# Altium PCB BD658T_AMP_ES4_220615_F.PcbDoc (part 2 of 4)
Units mm, origin at the board's own origin, x right, y up, seen from the top; angles counter-clockwise.
Board outline 153 x 112 mm, 4 copper layers (TOP, LAYER2, LAYER3, BOTTOM), stack 1.59 mm thick; 286 components, 184 nets, 896 pads, 614 vias.
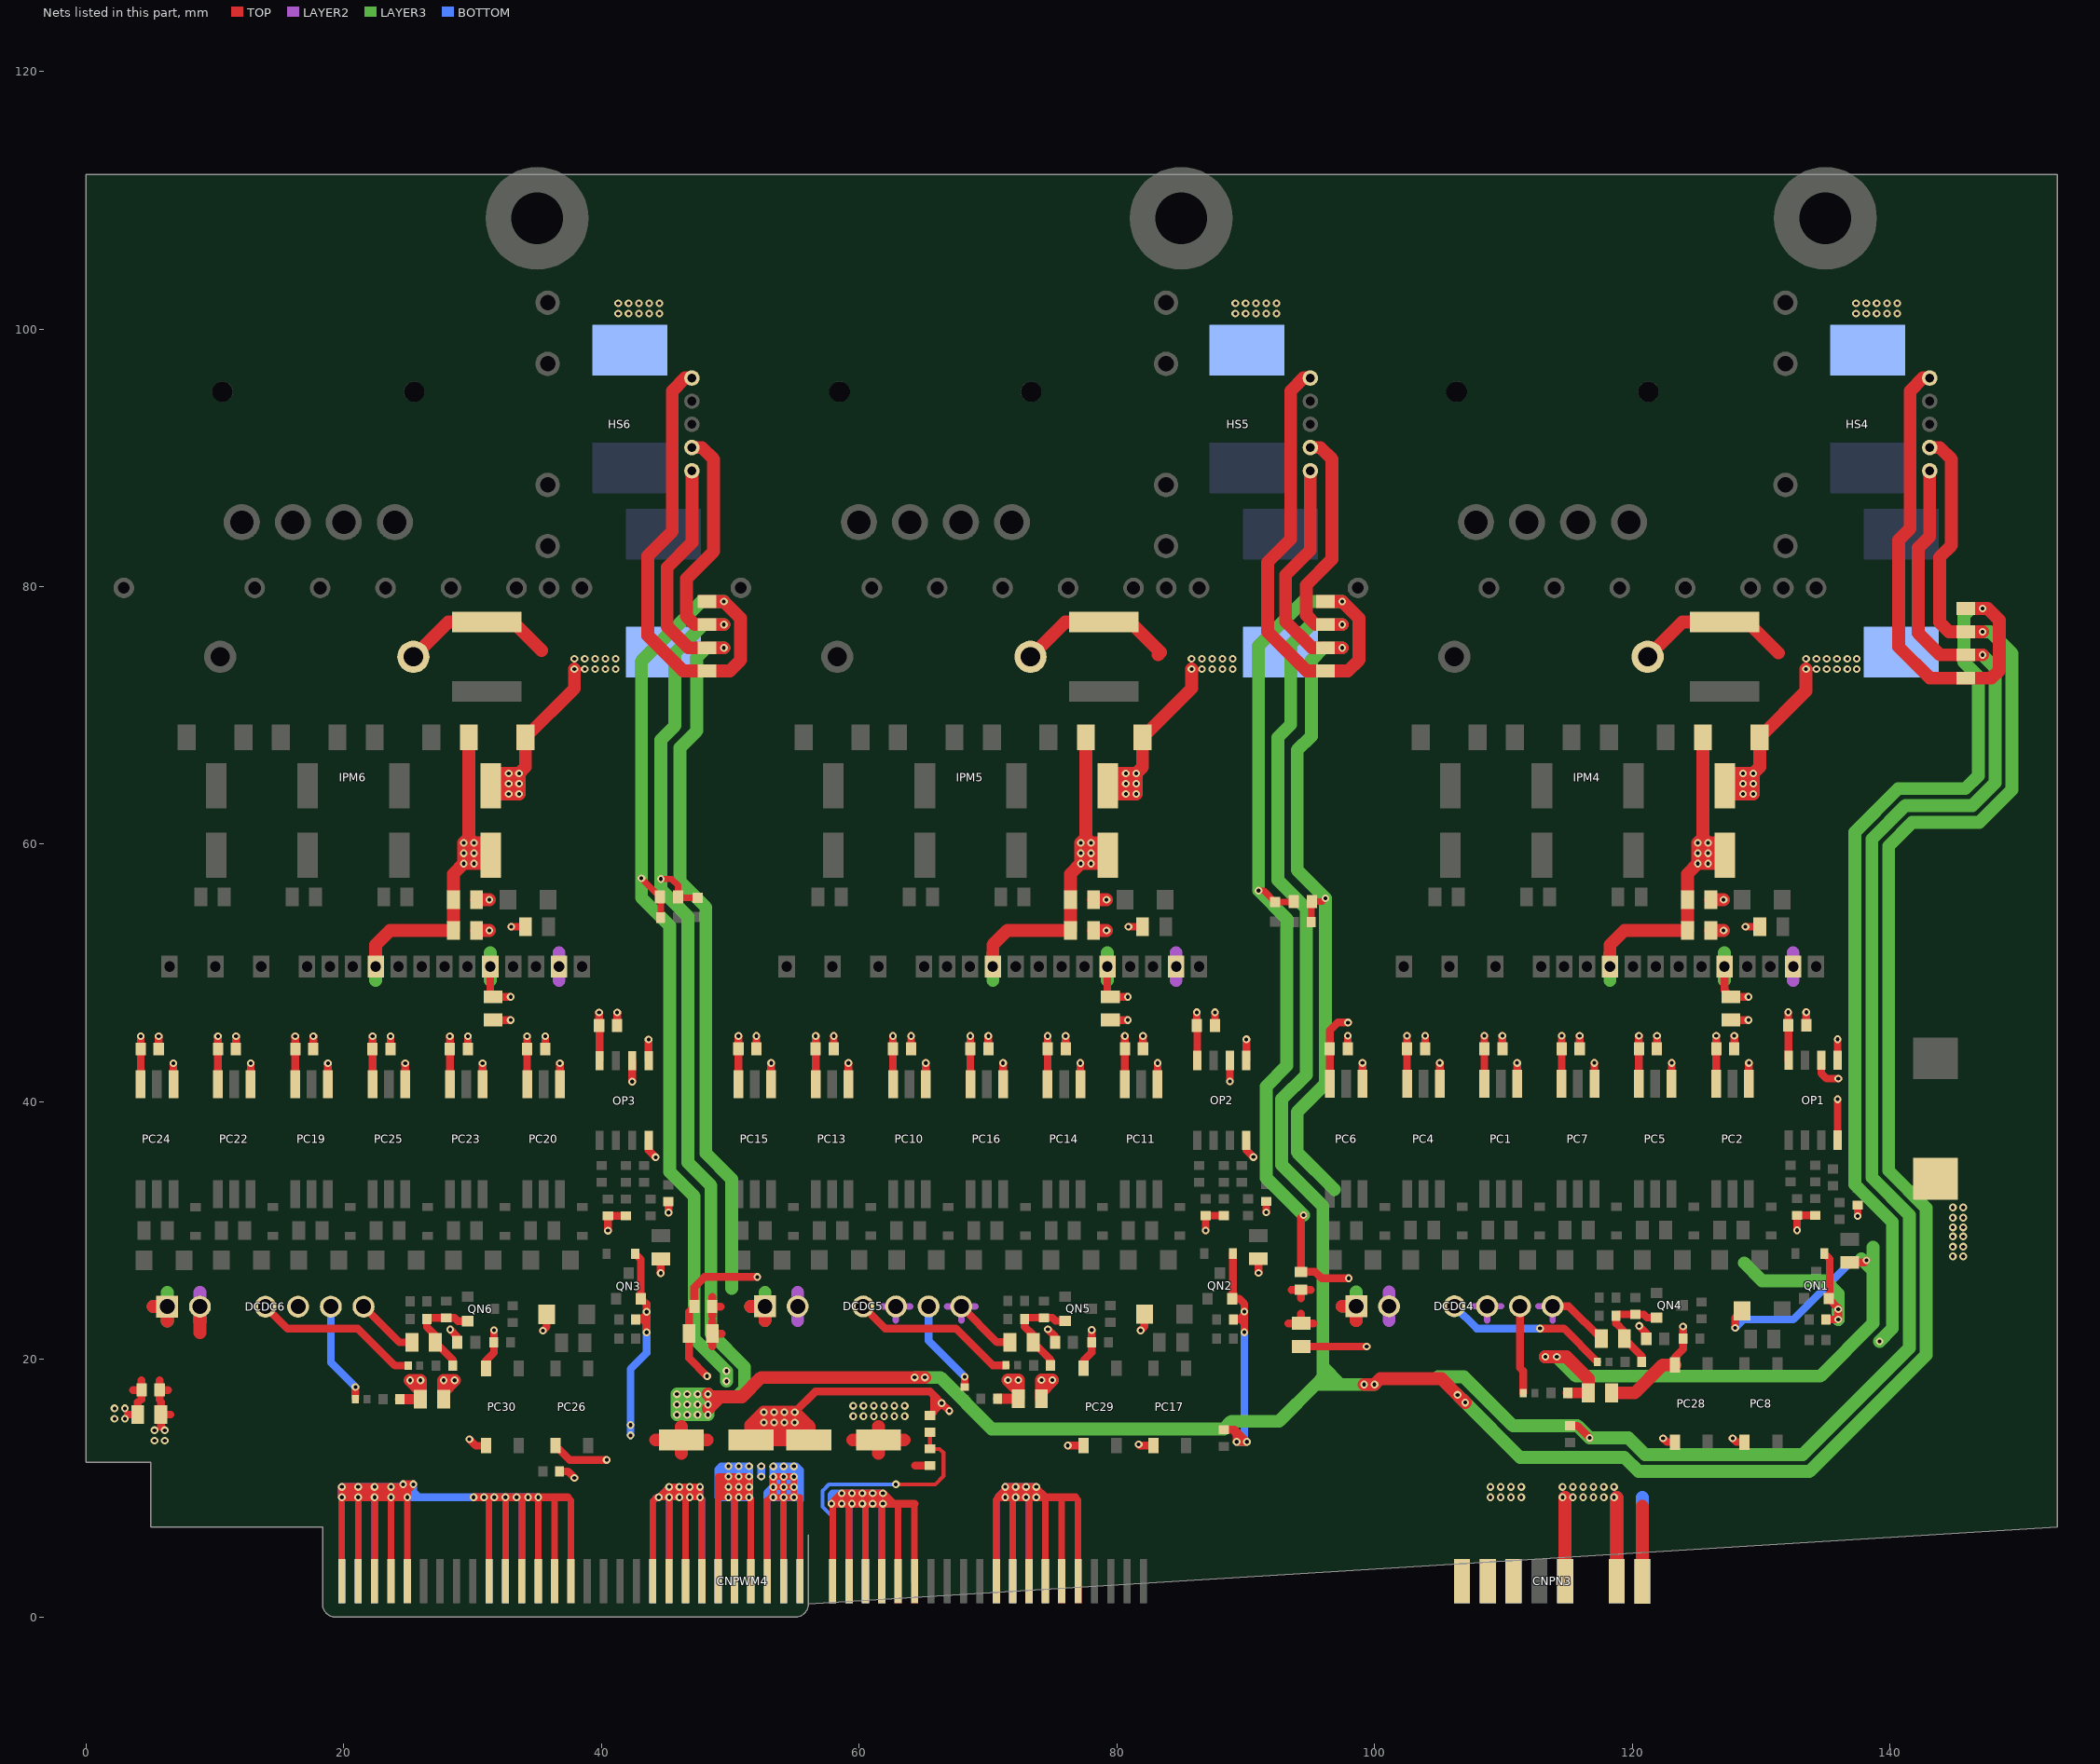
[diagram p4: the nets of this part, all layers, seen from the top]

## Via types
v1: diameter 0.6, hole 0.3, TOP to BOTTOM, 546 vias
v2: diameter 0.4, hole 0.4, TOP to BOTTOM, 56 vias
v3: diameter 6.5, hole 6.5, TOP to BOTTOM, 6 vias
v4: diameter 0.1/0.1/0.1/0.1 (per signal layer), hole 4, TOP to BOTTOM, 4 vias
v5: diameter 4, hole 4, TOP to BOTTOM, 2 vias

## Nets (pads, with @x,y where several pads share a name; then routed paths per layer and width w, separated by ;. In a path a pad name is that pad's centre, name@x,y a point inside that pad or via, vN(x,y) a via of type N, cw(c..) or ccw(c..) an arc to the next point about the centre after c; other vN are vias at no path point)
AMP_G_A4: BC1.2 BC2.1 BC4.2 BC11.2 BC19.2 C1.2 C11.2 C12.1 C13.2 C23.2 C24.1 C25.2 C35.2 C36.1 CNPWM4.10 CNPWM4.12 CNPWM4.13 CNPWM4.14 CNPWM4.15 CNPWM4.16 CNPWM4.17 CNPWM4.18 CNPWM4.19 CNPWM4.20 CNPWM4.30 CNPWM4.32 CNPWM4.33 CNPWM4.34 CNPWM4.35 CNPWM4.36 CNPWM4.37 CNPWM4.38 CNPWM4.40 CNPWM4.53 CNPWM4.54 CNPWM4.55 CNPWM4.56 CNPWM4.57 CNPWM4.58 CNPWM4.59 CNPWM4.60 CNPWM4.70 CNPWM4.72 CNPWM4.73 CNPWM4.74 CNPWM4.75 CNPWM4.76 CNPWM4.77 CNPWM4.78 CNPWM4.79 CNPWM4.80 CNPWM4.90 CNPWM4.92 CNPWM4.93 CNPWM4.94 CNPWM4.95 CNPWM4.96 CNPWM4.97 CNPWM4.98 DCDC4.2 DCDC5.2 DCDC6.2 EC1.2 EC2.1 HS4.5 HS5.5 HS6.5 LED1.2 PC8.3 PC17.3 PC26.3 PC28.3 PC29.3 PC30.3 R2.2 R112.1 | length 883.2
  TOP w0.5: CNPWM4.98@19.846,2.775 v1(19.846,9.3) ; CNPWM4.96@21.116,2.775 v1(21.116,9.3) ; CNPWM4.94@22.386,2.775 v1(22.386,9.3) ; CNPWM4.92@23.656,2.775 v1(23.656,9.3) ; CNPWM4.90@24.926,2.775 v1(24.926,9.3) ; CNPWM4.80@31.276,2.775 31.276,9.3 ; CNPWM4.78@32.546,2.775 v1(32.546,9.3) ; CNPWM4.76@33.816,2.775 33.816,9.3 ; CNPWM4.74@35.086,2.775 v1@35.086,9.3 ; CNPWM4.72@36.356,2.775 36.356,9.3 ; 37.4,9.3 37.626,9.074 CNPWM4.70@37.626,2.775 ; v1(43.1,57.35) BC2.1@44.55,55.9 44.6,55.85 R2.2@44.6,54.3 ; CNPWM4.60@43.976,2.775 43.976,8.976 44.3,9.3 v1(44.446,9.3) ; CNPWM4.58@45.246,2.775 v1(45.246,9.3) ; CNPWM4.56@46.516,2.775 46.516,9.3 ; CNPWM4.54@47.786,2.775 47.786,9.16 v1(47.646,9.3) ; v1(57.846,8.8) 57.946,8.7 v1@57.946,8.646 ; CNPWM4.40@57.946,2.775 v1@57.946,8.646 ; v1@58.1,8.8 v1@57.946,8.646 ; CNPWM4.38@59.216,2.775 v1@59.216,8.8 ; CNPWM4.36@60.486,2.775 v1@60.486,8.8 ; 61.046,9.254 61.5,8.8 61.756,8.544 CNPWM4.34@61.756,2.775 ; CNPWM4.32@63.026,2.775 63.026,8.8 ; CNPWM4.30@64.296,2.775 64.296,8.8 ; CNPWM4.20@70.646,2.775 70.646,9.146 70.8,9.3 ; CNPWM4.18@71.916,2.775 v1@71.916,9.3 ; CNPWM4.16@73.186,2.775 v1@73.186,9.3 ; CNPWM4.14@74.456,2.775 74.456,9.3 ; CNPWM4.12@75.726,2.775 75.726,9.3 ; 76.8,9.3 76.996,9.104 CNPWM4.10@76.996,2.775 ; v1(91,56.4) 91.4,56.4 LED1.2@92.3,55.5 93.7,55.5 BC1.2@93.75,55.55 ; v1(44.446,9.3) v1(45.246,9.3) ; v1(44.446,9.3) v1(45.246,10.1) ; v1(45.246,9.3) v1(46.046,10.1) ; v1(45.246,9.3) v1(46.046,9.3) ; v1(45.246,9.3) v1(45.246,10.1) ; v1(45.246,10.1) v1(46.046,9.3) ; v1(45.246,10.1) v1(46.046,10.1) ; v1(46.046,9.3) 46.516,9.3 ; v1(46.046,9.3) v1(46.846,10.1) ; v1(46.046,9.3) v1(46.046,10.1) ; v1(46.046,10.1) v1(46.846,10.1) ; v1(46.046,10.1) v1(46.846,9.3) ; 46.516,9.3 v1(46.846,9.3) ; v1(46.846,9.3) v1(46.846,10.1) ; v1(46.846,9.3) v1(47.646,9.3) ; v1(46.846,9.3) v1(47.646,10.1) ; v1(46.846,10.1) v1(47.646,10.1) ; v1(46.846,10.1) v1(47.646,9.3) ; v1(47.646,9.3) v1(47.646,10.1)
  TOP w0.6: 5.7,16.874 BC19.2@5.7,17.625 ; 5.7,18.376 BC19.2@5.7,17.625 ; 5.8,14.749 C25.2@5.8,15.725 ; 5.8,16.701 C25.2@5.8,15.725 ; 6.351,17.625 BC19.2@5.7,17.625 ; 6.551,15.725 C25.2@5.8,15.725 ; v1(29.75,13.8) 30.25,13.3 PC30.3@31.03,13.3 ; v1(30.076,9.3) v1(30.876,9.3) 31.276,9.3 v1(31.676,9.3) v1(32.546,9.3) v1(33.416,9.3) 33.816,9.3 v1(34.3,9.3) 35.086,9.3 v1(35.1,9.3) 36.356,9.3 37.4,9.3 ; PC26.3@36.43,13.3 37.53,12.2 v1(40.4,12.2) ; v1(48.2,18.7) 46.8,20.1 C13.2@46.8,22 46.8,23.7 BC11.2@47.2,24.1 47.2,25.6 48,26.4 v1(52.1,26.4) ; v1(55,15.9) 56.6,17.5 65.5,17.5 65.8,17.2 ; v1(57.846,8.8) v1(58.646,9.6) v1@58.9,9.6 ; 64.296,8.8 63.026,8.8 62.646,8.8 ; R112.1@65.5,15.65 65.8,15.95 65.8,16 ; v1(67,16) v1(66.4,16.6) ; v1(76.2,13.314) PC29.3@77.43,13.314 ; 76.8,9.3 75.726,9.3 74.456,9.3 ; v1(81.7,13.4) 81.786,13.314 PC17.3@82.83,13.314 ; C1.2@94.3,21 v1(99.4,21) ; v1(94.5,31.2) 94.3,31 BC4.2@94.3,26.8 95.4,26.8 95.9,26.3 v1(98,26.3) ; v1(122.4,13.877) 122.7,13.577 PC28.3@123.33,13.577 ; v1(127.8,13.877) 128.1,13.577 PC8.3@128.73,13.577 ; 19.846,9.77 20.316,9.3 ; 19.846,9.77 v1(19.846,9.3) 20.316,9.3 ; 19.846,9.77 v1(19.846,10.1) 20.4,10.1 ; 20.316,9.3 v1(21.116,10.1) ; 20.316,9.3 v1(21.116,9.3) ; 20.316,9.3 20.316,10.016 20.4,10.1 ; 20.4,10.1 v1(21.116,10.1) ; v1(21.116,9.3) v1(22.386,9.3) ; v1(21.116,9.3) v1(21.116,10.1) ; v1(21.116,9.3) 21.916,10.1 ; v1(21.116,10.1) 21.586,10.1 ; 21.586,10.1 21.916,10.1 ; 21.586,10.1 v1(22.386,9.3) ; 21.916,10.1 v1(22.386,10.1) ; v1(22.386,9.3) 22.856,9.3 ; v1(22.386,9.3) 22.386,9.77 ; 22.386,9.77 v1(22.386,10.1) ; 22.386,9.77 22.856,9.3 ; v1(22.386,10.1) 22.9,10.1 ; 22.856,9.3 22.856,10.056 22.9,10.1 ; 22.856,9.3 v1(23.656,9.3) ; 22.9,10.1 v1(23.656,10.1) ; 22.9,10.1 v1@23.656,9.344 ; v1(23.656,9.3) 24.1,9.3 ; v1(23.656,9.3) v1@23.656,9.344 ; v1@23.656,9.344 23.656,9.63 ; 23.656,9.63 24.126,10.1 ; 23.656,9.63 v1(23.656,10.1) ; v1(23.656,10.1) 24.126,10.1 ; 24.1,9.3 24.126,9.326 24.126,10.1 ; 24.1,9.3 v1(24.926,9.3) ; 24.126,10.1 v1@24.6,10.1 ; 24.126,10.1 v1(24.926,9.3) ; v1@24.6,10.1 24.926,10.1 24.926,9.826 ; v1@24.6,10.1 v1(24.6,10.3) v1(25.4,10.3) 24.926,9.826 ; v1(24.926,9.3) 24.926,9.826 ; v1(58.646,8.8) 58.1,8.8 v1@58.646,9.346 ; v1(58.646,8.8) 59.216,8.8 v1(59.446,8.8) ; v1(58.646,8.8) v1@58.646,9.346 ; v1(58.646,8.8) v1(59.446,9.6) ; v1@58.646,9.346 v1@58.9,9.6 ; v1@58.9,9.6 v1(59.446,9.6) ; v1(59.446,8.8) v1(60.246,9.6) ; v1(59.446,8.8) v1(60.246,8.8) ; v1(59.446,8.8) v1(59.446,9.6) ; v1(59.446,9.6) v1(60.246,9.6) ; v1(59.446,9.6) v1(60.246,8.8) ; v1(60.246,8.8) v1(61.046,9.6) ; v1(60.246,8.8) v1(60.246,9.6) ; v1(60.246,8.8) 60.486,8.8 v1(61.046,8.8) ; v1(60.246,9.6) v1(61.046,9.6) ; v1(60.246,9.6) v1(61.046,8.8) ; v1(61.046,8.8) 61.5,8.8 v1(61.846,8.8) ; v1(61.046,8.8) 61.046,9.254 v1(61.046,9.6) ; v1(61.046,8.8) v1(61.846,9.6) ; v1(61.046,9.6) v1(61.846,9.6) ; v1(61.046,9.6) v1(61.846,8.8) ; v1(61.846,8.8) 62.646,8.8 ; v1(61.846,8.8) v1(61.846,9.6) ; v1(61.846,9.6) 62.646,8.8 ; 65.8,16 v1(66.4,16.6) ; 65.8,16 65.8,17.2 ; 65.8,17.2 v1(66.4,16.6) ; v1(71.346,9.3) 70.8,9.3 v1@71.346,9.846 ; v1(71.346,9.3) 71.916,9.3 v1(72.146,9.3) ; v1(71.346,9.3) v1@71.346,9.846 ; v1(71.346,9.3) v1(72.146,10.1) ; v1@71.346,9.846 v1(71.346,10.1) ; v1(71.346,10.1) v1(72.146,10.1) ; v1(71.346,10.1) v1(72.146,9.3) ; v1(72.146,9.3) v1(72.946,10.1) ; v1(72.146,9.3) v1(72.946,9.3) ; v1(72.146,9.3) v1(72.146,10.1) ; v1(72.146,10.1) v1(72.946,10.1) ; v1(72.146,10.1) v1(72.946,9.3) ; v1(72.946,9.3) v1(72.946,10.1) ; v1(72.946,9.3) v1(73.746,10.1) ; v1(72.946,9.3) 73.186,9.3 v1(73.746,9.3) ; v1(72.946,10.1) v1(73.746,9.3) ; v1(72.946,10.1) v1(73.746,10.1) ; v1(73.746,9.3) 74.456,9.3 ; v1(73.746,9.3) v1@73.746,10.01 ; v1@73.746,10.01 74.456,9.3 ; v1@73.746,10.01 v1(73.746,10.1)
  TOP w1: 8.83,22.07 DCDC6.2@8.83,24.1 ; HS6.5@47.02,96.2 46.5,96.2 45.5,95.2 45.5,84.3 43.6,82.4 43.6,76.2 46.35,73.45 C35.2@48.2,73.45 49.95,73.45 50.8,74.3 50.8,77.55 v1(49.5,78.85) C36.1@48.2,78.85 ; HS5.5@95.02,96.2 94.5,96.2 93.5,95.2 93.5,83.7 91.7,81.9 91.7,76.5 94.75,73.45 C23.2@96.2,73.45 97.95,73.45 98.8,74.3 98.8,77.55 v1(97.5,78.85) C24.1@96.2,78.85 ; HS4.5@143.1,96.2 142.58,96.2 141.58,95.2 141.58,84.526 140.68,83.625 140.68,75.32 143.1,72.9 C11.2@145.9,72.9 147.9,72.9 148.5,73.5 148.5,77.4 147.6,78.3 v1(147.2,78.3) C12.1@145.9,78.3 ; EC2.1@51.6,13.75 EC2.1@52.85,13.75 ; EC2.1@51.6,13.75 EC2.1@51.6,14.1 ; EC2.1@51.6,13.75 52.95,15.1 ; EC2.1@51.6,14.1 v1(52.6,15.1) ; EC2.1@51.6,14.1 51.6,14.8 ; 51.6,14.8 51.6,14.9 v1(52.6,15.9) ; 51.6,14.8 51.9,15.1 ; 51.9,15.1 v1@52.6,15.8 ; 51.9,15.1 v1(52.6,15.1) ; v1(52.6,15.1) v1@52.6,15.8 ; v1(52.6,15.1) 52.95,15.1 ; v1@52.6,15.8 v1(52.6,15.9) ; v1(52.6,15.9) v1(53.4,15.9) ; EC2.1@52.85,13.75 54.1,13.75 ; EC2.1@52.85,13.75 v1@54.1,15 ; 52.95,15.1 v1(53.4,15.1) ; v1(53.4,15.1) v1(53.4,15.9) ; v1(53.4,15.1) v1(54.2,15.1) ; v1(53.4,15.9) v1(54.2,15.9) ; 54.1,13.75 v1@54.1,15 ; 54.1,13.75 EC1.2@55.55,13.75 ; v1@54.1,15 v1(54.2,15.1) ; v1(54.2,15.1) v1(54.2,15.9) ; v1(54.2,15.1) EC1.2@55.55,13.75 ; v1(54.2,15.1) v1(55,15.1) ; v1(54.2,15.9) v1(55,15.9) ; v1(55,15.1) 55,14.85 EC1.2@56.1,13.75 ; v1(55,15.1) 55.8,15.1 ; v1(55,15.1) v1(55,15.9) ; v1(55,15.9) 55.8,15.1 ; EC1.2@55.55,13.75 EC1.2@56.1,13.75 ; 55.8,15.1 56.1,14.8 EC1.2@56.1,13.75
  LAYER2 w1: 8.83,22.999 DCDC6.2@8.83,24.1 8.83,25.201 ; 55.23,23.013 DCDC5.2@55.23,24.114 55.23,25.215 ; 101.13,23.026 DCDC4.2@101.13,24.127 101.13,25.228
  LAYER3 w1: v1(49.5,78.85) 47.75,78.85 43.1,74.2 v1(43.1,57.35) 43.1,55.857 45.3,53.657 45.3,34.557 47.2,32.657 47.2,21.6 v1(49.7,19.1) v1(49.7,18.3) ; v1(94.5,31.2) 91.6,34.1 91.6,41.2 93.2,42.8 93.2,54.2 v1(91,56.4) 91,75.4 94.45,78.85 v1(97.5,78.85) ; v1(139.2,21.4) 140.2,22.4 140.2,30.66 137.29,33.57 137.29,60.945 140.665,64.32 145.865,64.32 146.865,65.32 146.865,73.035 145.75,74.15 145.75,77.75 146.3,78.3 v1(147.2,78.3)
  BOTTOM w0.5: CNPWM4.97@19.846,2.775 v1(19.846,9.3) ; CNPWM4.95@21.116,2.775 v1(21.116,9.3) ; CNPWM4.93@22.386,2.775 v1(22.386,9.3) ; CNPWM4.79@31.276,2.775 31.276,9.3 ; CNPWM4.77@32.546,2.775 v1(32.546,9.3) ; CNPWM4.75@33.816,2.775 33.816,9.3 ; 34.8,9.3 35.086,9.014 CNPWM4.73@35.086,2.775 ; CNPWM4.59@43.976,2.775 43.976,8.976 44.3,9.3 v1(44.446,9.3) ; CNPWM4.57@45.246,2.775 v1(45.246,9.3) ; CNPWM4.55@46.516,2.775 46.516,9.3 ; CNPWM4.53@47.786,2.775 47.786,9.16 v1(47.646,9.3) ; v1@57.946,8.8 v1(58.646,8.8) ; CNPWM4.37@59.216,2.775 v1@59.216,8.8 ; CNPWM4.35@60.486,2.775 v1@60.486,8.8 ; v1(61.046,8.8) 61.6,8.8 61.756,8.644 CNPWM4.33@61.756,2.775 ; CNPWM4.19@70.646,2.775 70.646,9.146 70.8,9.3 v1(71.346,9.3) ; CNPWM4.17@71.916,2.775 v1@71.916,9.3 ; CNPWM4.15@73.186,2.775 v1@73.186,9.3 ; v1(73.746,9.3) 74.3,9.3 74.456,9.144 CNPWM4.13@74.456,2.775 ; v1(44.446,9.3) v1(45.246,10.1) ; v1(44.446,9.3) v1(45.246,9.3) ; v1(45.246,9.3) v1(46.046,9.3) ; v1(45.246,9.3) v1(45.246,10.1) ; v1(45.246,9.3) v1(46.046,10.1) ; v1(45.246,10.1) v1(46.046,10.1) ; v1(45.246,10.1) v1(46.046,9.3) ; v1(46.046,9.3) v1(46.046,10.1) ; v1(46.046,9.3) v1(46.846,10.1) ; v1(46.046,9.3) 46.516,9.3 ; v1(46.046,10.1) v1(46.846,10.1) ; v1(46.046,10.1) v1(46.846,9.3) ; 46.516,9.3 v1(46.846,9.3) ; v1(46.846,9.3) v1(47.646,9.3) ; v1(46.846,9.3) v1(46.846,10.1) ; v1(46.846,9.3) v1(47.646,10.1) ; v1(46.846,10.1) v1(47.646,10.1) ; v1(46.846,10.1) v1(47.646,9.3) ; v1(47.646,9.3) v1(47.646,10.1)
  BOTTOM w0.6: v1(35.1,9.3) 34.8,9.3 v1(34.3,9.3) 33.816,9.3 v1(33.416,9.3) v1(32.546,9.3) v1(31.676,9.3) 31.276,9.3 v1(30.876,9.3) v1(30.076,9.3) 25.8,9.3 ; v1(52.4,10.9) v1(52.4,11.7) ; v1(57.846,8.8) 57.846,9.5 57.946,9.6 ; 70.8,9.3 v1@71.346,9.846 ; 74.3,9.3 v1@73.746,9.854 ; v1(19.846,10.1) 20.646,9.3 ; v1(19.846,10.1) v1(21.116,10.1) ; v1(19.846,10.1) v1(19.846,9.3) 20.316,9.3 ; 20.316,9.3 20.646,9.3 ; 20.316,9.3 v1(21.116,10.1) ; 20.646,9.3 v1(21.116,9.3) ; v1(21.116,9.3) v1(21.116,10.1) ; v1(21.116,9.3) v1@21.4,9.3 ; v1(21.116,10.1) 21.916,9.3 ; v1(21.116,10.1) v1@22.2,10.1 ; v1@21.4,9.3 21.916,9.3 ; v1@21.4,9.3 v1@22.2,10.1 ; 21.916,9.3 v1(22.386,9.3) ; v1@22.2,10.1 v1(22.386,10.1) ; v1(22.386,9.3) 22.9,9.3 ; v1(22.386,9.3) 22.386,9.63 ; 22.386,9.63 22.856,10.1 ; 22.386,9.63 v1(22.386,10.1) ; v1(22.386,10.1) 22.856,10.1 ; 22.856,10.1 22.856,9.344 22.9,9.3 ; 22.856,10.1 v1(23.656,10.1) ; 22.856,10.1 v1(23.656,9.3) ; 22.9,9.3 v1(23.656,9.3) ; v1(23.656,9.3) 24.456,9.3 ; v1(23.656,9.3) v1(23.656,10.1) ; v1(23.656,10.1) 24.456,9.3 ; v1(23.656,10.1) 24.4,10.1 v1(24.6,10.3) ; 24.456,9.3 24.6,9.444 v1(24.6,10.3) ; 24.456,9.3 v1(24.926,9.3) ; v1(24.6,10.3) 24.926,9.974 24.926,9.826 ; v1(24.926,9.3) 25.4,9.3 ; v1(24.926,9.3) 24.926,9.826 ; 24.926,9.826 v1(25.4,10.3) 25.4,9.7 ; 25.4,9.3 25.8,9.3 ; 25.4,9.3 25.4,9.7 ; 25.4,9.7 25.8,9.3 ; 57.946,9.5 v1(58.646,8.8) ; 57.946,9.5 57.946,8.8 v1@58.646,9.5 ; 57.946,9.5 57.946,9.6 ; 57.946,9.6 v1(58.646,9.6) ; v1(58.646,8.8) 59.216,8.8 v1(59.446,8.8) ; v1(58.646,8.8) v1@58.646,9.5 ; v1(58.646,8.8) v1(59.446,9.6) ; v1@58.646,9.5 v1(58.646,9.6) ; v1(58.646,9.6) v1(59.446,9.6) ; v1(58.646,9.6) v1(59.446,8.8) ; v1(59.446,8.8) v1(59.446,9.6) ; v1(59.446,8.8) v1(60.246,9.6) ; v1(59.446,8.8) v1(60.246,8.8) ; v1(59.446,9.6) v1(60.246,8.8) ; v1(59.446,9.6) v1(60.246,9.6) ; v1(60.246,8.8) 60.486,8.8 v1(61.046,8.8) ; v1(60.246,8.8) v1(61.046,9.6) ; v1(60.246,9.6) v1(61.046,8.8) ; v1(60.246,9.6) v1(61.046,9.6) ; v1(61.046,8.8) v1(61.046,9.6) ; v1(61.046,8.8) v1(61.846,9.6) ; v1(61.046,9.6) v1(61.846,9.6) ; v1(61.046,9.6) v1(61.846,8.8) v1(61.846,9.6) ; v1@71.346,9.846 v1(71.346,9.3) 71.916,9.3 v1(72.146,9.3) ; v1@71.346,9.846 v1(71.346,10.1) ; v1(71.346,10.1) v1(72.146,9.3) ; v1(71.346,10.1) v1(72.146,10.1) ; v1(72.146,9.3) v1(72.146,10.1) ; v1(72.146,9.3) v1(72.946,9.3) ; v1(72.146,9.3) v1(72.946,10.1) ; v1(72.146,10.1) v1(72.946,10.1) ; v1(72.146,10.1) v1(72.946,9.3) ; v1(72.946,9.3) v1(72.946,10.1) ; v1(72.946,9.3) v1(73.746,10.1) ; v1(72.946,9.3) 73.186,9.3 v1(73.746,9.3) ; v1(72.946,10.1) v1(73.746,9.3) ; v1(72.946,10.1) v1(73.746,10.1) ; v1(73.746,9.3) v1@73.746,9.854 ; v1@73.746,9.854 v1(73.746,10.1)
  other v1: 5.3,13.7 6.1,13.7 5.3,14.5 6.1,14.5
AMP_N15_A4: BC2.2 C12.2 C24.2 C36.2 CNPWM4.47 CNPWM4.48 CNPWM4.49 CNPWM4.50 CNPWM4.51 CNPWM4.52 EC2.2 HS4.2 HS5.2 HS6.2 LED2.2 | length 490.5
  TOP w0.5: v1(44.6,57.3) 45.45,57.3 45.95,56.8 BC2.2@45.95,55.9 46,55.85 LED2.2@47.45,55.85 ; CNPWM4.52@49.056,2.775 49.056,9.3 ; CNPWM4.50@50.326,2.775 50.326,9.3 ; CNPWM4.48@51.596,2.775 51.596,9.16 v1(51.456,9.3) ; 49.056,9.3 v1(49.856,10.1) ; 49.056,9.3 v1(49.856,9.3) ; 49.056,9.3 49.056,10.1 ; 49.056,10.1 v1(49.856,10.9) ; 49.056,10.1 v1(49.856,9.3) ; 49.056,10.1 49.056,10.9 ; 49.056,10.1 v1(49.856,10.1) ; 49.056,10.9 v1(49.856,10.9) ; 49.056,10.9 v1(49.856,10.1) ; v1(49.856,9.3) v1(49.856,10.1) ; v1(49.856,9.3) v1(50.656,10.1) ; v1(49.856,9.3) 50.326,9.3 ; v1(49.856,10.1) v1(50.656,10.9) ; v1(49.856,10.1) v1(49.856,10.9) ; v1(49.856,10.1) v1(50.656,9.3) ; v1(49.856,10.1) v1(50.656,10.1) ; v1(49.856,10.9) v1(50.656,10.9) ; v1(49.856,10.9) v1(50.656,10.1) ; 50.326,9.3 v1(50.656,9.3) ; v1(50.656,9.3) v1(50.656,10.1) ; v1(50.656,9.3) v1(51.456,10.1) ; v1(50.656,9.3) v1(51.456,9.3) ; v1(50.656,10.1) v1(51.456,10.1) ; v1(50.656,10.1) v1(51.456,10.9) ; v1(50.656,10.1) v1(50.656,10.9) ; v1(50.656,10.1) v1(51.456,9.3) ; v1(50.656,10.9) v1(51.456,10.9) ; v1(50.656,10.9) v1(51.456,10.1) ; v1(51.456,9.3) v1(51.456,10.1) ; v1(51.456,10.1) v1(51.456,10.9)
  TOP w1: 44.199,13.75 EC2.2@46.2,13.75 ; 46.2,12.699 EC2.2@46.2,13.75 ; 46.2,14.801 EC2.2@46.2,13.75 ; HS6.2@47.02,90.8 47.8,90.8 48.7,89.9 48.7,82.729 46.6,80.629 46.6,77.7 47.25,77.05 C36.2@48.2,77.05 v1(49.5,77.05) ; 48.201,13.75 EC2.2@46.2,13.75 ; v1(48.256,17.3) 48.456,17.1 49.2,17.1 ; 48.3,16.2 49.2,17.1 ; v1(65.1,18.6) v1(64.3,18.6) 52.4,18.6 50.9,17.1 49.2,17.1 ; HS5.2@95.02,90.8 95.8,90.8 96.7,89.9 96.7,82.128 94.7,80.129 94.7,77.8 95.45,77.05 C24.2@96.2,77.05 v1(97.5,77.05) ; v1(99.2,18.055) v1(100,18.055) 100.445,18.5 105.2,18.5 v1(106.45,17.25) v1(107.05,16.65) ; HS4.2@143.1,90.8 143.88,90.8 144.78,89.9 144.78,83.2 143.88,82.3 143.88,77.22 144.6,76.5 C12.2@145.9,76.5 v1(147.2,76.5)
  LAYER3 w1: v1(49.5,77.05) 47.9,77.05 45.7,74.85 45.7,69.2 44.6,68.1 v1(44.6,57.3) 44.6,56.478 46.7,54.379 46.7,35.279 48.5,33.478 48.5,22 51.1,19.4 51.1,17.7 50.5,17.1 48.456,17.1 v1(48.256,17.3) ; v1(64.3,18.6) v1(65.1,18.6) 66.3,18.6 70.3,14.6 88.3,14.6 88.9,15.2 92.6,15.2 95.455,18.055 ; v1(97.5,77.05) 95.05,77.05 93.5,75.5 93.5,69.3 92.5,68.3 92.5,57.2 94.7,55 94.7,42.1 92.8,40.2 92.8,35.1 96,31.9 96,19.4 ; v1(100,18.055) v1(99.2,18.055) 97.345,18.055 ; v1(106.45,17.25) v1(107.05,16.65) 111.3,12.4 119.4,12.4 120.5,11.3 133.766,11.3 142.82,20.355 142.82,31.745 139.91,34.656 139.91,59.86 141.75,61.7 146.95,61.7 149.485,64.235 149.485,74.815 147.8,76.5 v1(147.2,76.5) ; v1(46.656,15.7) v1(45.856,15.7) v1(45.856,16.5) v1(45.856,17.3) v1(46.656,17.3) ; v1(46.656,15.7) v1(47.456,15.7) ; v1(46.656,15.7) v1(46.656,16.5) v1(46.656,17.3) ; v1(46.656,17.3) v1(47.456,17.3) ; v1(47.456,15.7) v1(48.256,15.7) v1(48.256,16.5) v1(48.256,17.3) ; v1(47.456,15.7) v1(47.456,16.5) v1(47.456,17.3) ; v1(47.456,17.3) v1(48.256,17.3) ; 95.455,18.055 96,18.6 96,19.4 ; 95.455,18.055 97.345,18.055 ; 96,19.4 97.345,18.055
  BOTTOM w0.5: CNPWM4.51@49.056,2.775 49.056,9.3 ; CNPWM4.49@50.326,2.775 50.326,9.3 ; v1(51.456,9.3) 51.596,9.16 CNPWM4.47@51.596,2.775
  BOTTOM w0.6: 49.056,9.3 v1(49.856,10.1) ; 49.056,9.3 v1(49.856,9.3) ; 49.056,9.3 49.056,10.1 ; 49.056,10.1 v1(49.856,10.9) ; 49.056,10.1 v1(49.856,9.3) ; 49.056,10.1 49.056,10.556 ; 49.056,10.556 49.4,10.9 ; 49.056,10.556 49.056,11.1 ; 49.056,11.1 49.056,11.456 49.3,11.7 ; 49.056,11.1 v1@49.656,11.7 ; 49.3,11.7 v1@49.656,11.7 ; 49.3,11.7 v1@49.856,11.144 ; 49.4,10.9 49.4,10.556 v1(49.856,10.1) ; 49.4,10.9 v1(49.856,10.9) ; v1@49.656,11.7 v1(49.856,11.7) ; v1(49.856,9.3) v1(50.656,10.1) ; v1(49.856,9.3) v1(49.856,10.1) ; v1(49.856,9.3) 50.326,9.3 v1(50.656,9.3) ; v1(49.856,10.1) v1(50.656,10.1) ; v1(49.856,10.1) v1(50.656,9.3) ; v1(49.856,10.1) v1(50.656,10.9) ; v1(49.856,10.1) v1(49.856,10.9) ; v1(49.856,10.9) v1@49.856,11.144 ; v1(49.856,10.9) v1(50.656,10.9) ; v1(49.856,10.9) v1(50.656,11.7) ; v1(49.856,10.9) v1(50.656,10.1) ; v1@49.856,11.144 v1(49.856,11.7) ; v1(49.856,11.7) v1(50.656,11.7) ; v1(49.856,11.7) v1(50.656,10.9) ; v1(50.656,9.3) v1(51.456,9.3) ; v1(50.656,9.3) v1(51.456,10.1) ; v1(50.656,9.3) v1(50.656,10.1) ; v1(50.656,10.1) v1(51.456,10.1) ; v1(50.656,10.1) v1(51.456,9.3) ; v1(50.656,10.1) v1(50.656,10.9) ; v1(50.656,10.1) v1(51.456,10.9) ; v1(50.656,10.9) v1(51.456,10.9) ; v1(50.656,10.9) v1(51.456,10.1) ; v1(50.656,10.9) v1(51.456,11.7) ; v1(50.656,11.7) v1(51.456,11.7) ; v1(50.656,11.7) v1(51.456,10.9) ; v1(51.456,9.3) v1(51.456,10.1) ; v1(51.456,10.1) v1(51.456,10.9) ; v1(51.456,10.9) v1(51.456,11.7)
AMP_P15_A4: BC1.1 BC4.1 BC11.1 BC19.1 C1.1 C11.1 C13.1 C23.1 C25.1 C35.1 CNPWM4.41 CNPWM4.42 CNPWM4.43 CNPWM4.44 CNPWM4.45 CNPWM4.46 D7.1 D15.1 D23.1 DCDC4.1 DCDC5.1 DCDC6.1 EC1.1 HS4.1 HS5.1 HS6.1 QN1.2 QN2.2 QN3.2 R1.2 R15.1 R19.2 R46.1 R50.2 R77.1 R81.2 R111.2 | length 447
  TOP w0.5: CNPWM4.46@52.866,2.775 52.866,9.066 53.094,9.294 v1(53.336,9.294) ; CNPWM4.44@54.136,2.775 v1(54.136,9.294) ; CNPWM4.42@55.406,2.775 55.406,9.287 55.4,9.294 v1(54.936,9.294) ; R1.2@95.1,53.95 95.1,55.5 BC1.1@95.15,55.55 95.95,55.55 v1(96.2,55.8) ; v1(53.336,9.294) v1(53.336,10.094) ; v1(53.336,9.294) v1(54.136,9.294) ; v1(53.336,10.094) v1(54.136,10.094) ; v1(53.336,10.094) v1(53.336,10.894) v1(54.136,10.894) ; v1(54.136,9.294) v1@54.136,9.394 ; v1@54.136,9.394 54.236,9.294 v1(54.936,9.294) ; v1@54.136,9.394 v1(54.136,10.094) ; v1(54.136,10.094) v1(54.136,10.894) ; v1(54.136,10.094) v1(54.936,10.094) ; v1(54.136,10.894) v1(54.936,10.894) v1(54.936,10.094) ; v1(54.936,9.294) v1(54.936,10.094)
  TOP w0.6: 3.249,15.725 C25.1@4,15.725 4,16.701 ; 3.649,17.625 BC19.1@4.3,17.625 ; 4.3,16.874 BC19.1@4.3,17.625 ; 4.3,18.376 BC19.1@4.3,17.625 ; R81.2@36.75,11.3 37.4,11.3 v1(37.9,10.8) ; D23.1@42.615,28.2 43.05,27.765 QN3.2@43.05,24.7 43.1,24.7 43.5,24.3 v1(43.5,23.7) v1@43.5,23.5 ; R77.1@42.65,23.1 43.1,23.1 ; v1(43.5,22.1) 43.5,22.8 ; 48.6,21.024 C13.1@48.6,22 ; 48.6,22.976 C13.1@48.6,22 ; 48.6,23.349 BC11.1@48.6,24.1 ; 48.6,24.851 BC11.1@48.6,24.1 ; 49.251,24.1 BC11.1@48.6,24.1 ; 49.351,22 C13.1@48.6,22 ; 64.35,11.75 R111.2@65.5,11.75 ; R50.2@88.3,14.55 88.95,14.55 ; D15.1@89.015,28.214 89.015,24.779 QN2.2@88.95,24.714 89.5,24.714 89.9,24.314 v1(89.9,23.714) v1@89.9,23.514 ; R46.1@89.05,23.114 89.5,23.114 ; v1(89.9,22.114) 89.9,22.814 ; 93.324,22.8 C1.1@94.3,22.8 ; 93.549,25.4 BC4.1@94.3,25.4 ; 94.3,23.551 C1.1@94.3,22.8 ; 94.3,24.749 BC4.1@94.3,25.4 ; 95.051,25.4 BC4.1@94.3,25.4 ; 95.276,22.8 C1.1@94.3,22.8 ; R19.2@115.2,14.85 115.75,14.85 v1(116.7,13.9) ; D7.1@134.915,28.227 135.339,27.803 135.339,24.817 QN1.2@135.25,24.727 136,23.977 v1(136,23.9) v1(136,23.1) R15.1@135.05,23.1 ; 43.1,23.1 v1@43.5,23.5 ; 43.1,23.1 43.2,23.1 43.5,22.8 ; 43.5,22.8 v1@43.5,23.5 ; 88.95,14.55 89.15,14.55 v1(90.1,13.6) v1(89.3,13.6) 89.3,14.2 88.95,14.55 ; 89.5,23.114 89.6,23.114 89.9,22.814 ; 89.5,23.114 v1@89.9,23.514 ; 89.9,22.814 v1@89.9,23.514
  TOP w1: 5.189,24.1 DCDC6.1@6.29,24.1 6.29,22.999 ; HS6.1@47.02,89 47.02,83.424 45.1,81.504 45.1,76.9 46.75,75.25 C35.1@48.2,75.25 v1(49.5,75.25) ; 51.589,24.114 DCDC5.1@52.69,24.114 52.69,23.013 ; 59.499,13.75 EC1.1@61.5,13.75 ; 61.5,12.699 EC1.1@61.5,13.75 ; 61.5,14.801 EC1.1@61.5,13.75 ; 63.501,13.75 EC1.1@61.5,13.75 ; HS5.1@95.02,89 95.02,82.824 93.1,80.904 93.1,77.3 95.15,75.25 C23.1@96.2,75.25 v1(97.5,75.25) ; 97.489,24.127 DCDC4.1@98.59,24.127 98.59,23.026 ; HS4.1@143.1,89 143.1,83.896 142.2,82.996 142.2,76.4 143.9,74.7 C11.1@145.9,74.7 v1(147.2,74.7)
  LAYER3 w0.6: v1(89.3,13.6) v1(90.1,13.6)
  LAYER3 w1: 5.189,24.1 DCDC6.1@6.29,24.1 ; 6.29,22.999 DCDC6.1@6.29,24.1 ; 6.29,25.201 DCDC6.1@6.29,24.1 ; v1(49.5,75.25) 48.15,75.25 47.4,74.5 47.4,68.8 46.1,67.5 46.1,57.1 48.1,55.1 48.1,36 50.1,34 50.1,25.499 ; 51.589,24.114 DCDC5.1@52.69,24.114 ; 52.69,23.013 DCDC5.1@52.69,24.114 ; 52.69,25.215 DCDC5.1@52.69,24.114 ; 96.9,33.2 94,36.1 94,39.2 96.2,41.4 v1(96.2,55.8) 94,58 94,67.3 95.1,68.4 95.1,74.3 96.05,75.25 v1(97.5,75.25) ; 97.489,24.127 DCDC4.1@98.59,24.127 ; 98.59,23.026 DCDC4.1@98.59,24.127 ; 98.59,25.228 DCDC4.1@98.59,24.127 ; 104.95,18.65 106.95,18.65 110.75,14.85 115.75,14.85 v1(116.7,13.9) 119.7,13.9 121,12.6 133.227,12.6 141.52,20.893 141.52,31.207 138.61,34.117 138.61,60.398 141.212,63 146.412,63 148.185,64.774 148.185,73.715 v1(147.2,74.7) ; 128.7,27.5 130.1,26.1 135,26.1 136,25.1 v1(136,23.9) v1(136,23.1)
  BOTTOM w0.5: CNPWM4.45@52.866,2.775 52.866,9.294 ; CNPWM4.43@54.136,2.775 v1(54.136,9.294) ; v1(54.936,9.294) 55.206,9.294 55.406,9.094 CNPWM4.41@55.406,2.775
  BOTTOM w0.6: v1(42.25,14.1) v1(42.25,14.9) 42.25,19.25 43.5,20.5 v1(43.5,22.1) v1(43.5,23.7) ; 55.406,9.094 55.406,9.624 ; v1(89.9,23.714) v1(89.9,22.114) 89.9,14.2 ; 52.866,9.294 52.866,9.624 v1(53.336,10.094) ; 52.866,9.294 53.336,9.764 ; 52.866,9.294 v1(53.336,9.294) ; v1(53.336,9.294) v1(54.136,10.094) ; v1(53.336,9.294) v1(54.136,9.294) ; v1(53.336,9.294) 53.336,9.764 ; 53.336,9.764 v1(53.336,10.094) ; v1(53.336,10.094) v1(54.136,9.294) ; v1(53.336,10.094) v1(53.336,10.894) ; v1(53.336,10.094) v1(54.136,10.094) ; v1(53.336,10.094) v1(54.136,10.894) ; v1(53.336,10.894) v1(54.136,10.894) ; v1(53.336,10.894) v1(54.136,10.094) ; v1(53.336,10.894) v1(53.336,11.694) ; v1(53.336,10.894) v1(54.136,11.694) ; v1(53.336,11.694) v1(54.136,10.894) ; v1(53.336,11.694) v1(54.136,11.694) ; v1(54.136,9.294) v1(54.136,10.094) ; v1(54.136,9.294) v1(54.936,9.294) ; v1(54.136,9.294) v1(54.936,10.094) ; v1(54.136,10.094) v1(54.936,9.294) ; v1(54.136,10.094) v1(54.136,10.894) ; v1(54.136,10.094) v1(54.936,10.094) ; v1(54.136,10.094) v1(54.936,10.894) ; v1(54.136,10.894) v1(54.936,10.894) ; v1(54.136,10.894) v1(54.136,11.694) ; v1(54.136,10.894) v1(54.936,11.694) ; v1(54.136,11.694) v1(54.936,10.894) ; v1(54.136,11.694) v1(54.936,11.694) ; v1(54.936,9.294) v1(54.936,10.094) ; v1(54.936,10.094) v1(54.936,10.894) ; v1(54.936,10.094) 55.406,9.624 ; v1(54.936,10.894) 55.406,10.424 ; v1(54.936,10.894) v1(54.936,11.694) ; v1(54.936,11.694) 55.106,11.694 55.406,11.394 55.406,10.424 ; 55.406,9.624 55.406,10.424 ; 89.9,14.2 89.9,13.8 v1(90.1,13.6) v1(89.3,13.6) 89.9,14.2
  BOTTOM w1: v1(136,23.1) v1(136,23.9)
  other v1: 2.2,15.4 3,15.4 59.536,15.594 60.336,15.594 61.136,15.594 61.936,15.594 62.736,15.594 63.536,15.594 2.2,16.2 3,16.2 59.536,16.394 60.336,16.394 61.136,16.394 61.936,16.394 62.736,16.394 63.536,16.394
CVTG_4: BC3.1 BC5.1 BC6.1 BC7.1 BC8.1 BC9.1 BC10.1 BC12.1 BC13.1 BC14.1 BC15.1 BC16.1 BC17.1 BC18.1 BC20.1 BC21.1 BC22.1 BC23.1 BC24.1 BC25.1 BC26.1 C5.2 C6.2 C7.2 C8.2 C9.2 C10.2 C17.2 C18.2 C19.2 C20.2 C21.2 C22.2 C28.2 C29.2 C31.2 C32.2 C33.2 C34.2 C37.2 C38.2 C39.2 CNPN3.11 CNPN3.12 CNPN3.13 CNPN3.14 CNPN3.15 CNPN3.16 CS4.2 CS5.2 CS6.2 CST4.2 CST5.2 CST6.2 DCDC4.5 DCDC4.7 DCDC5.5 DCDC5.7 DCDC6.5 DCDC6.7 EC6.2 EC10.2 EC14.2 IPM4.16 IPM5.16 IPM6.16 OP1.4 OP1.5 OP1.6 OP2.4 OP2.5 OP2.6 OP3.4 OP3.5 OP3.6 PC1.4 PC2.4 PC4.4 PC5.4 PC6.4 PC7.4 PC10.4 PC11.4 PC13.4 PC14.4 PC15.4 PC16.4 PC19.4 PC20.4 PC22.4 PC23.4 PC24.4 PC25.4 PC28.2 PC29.2 PC30.2 R27.2 R30.2 R32.2 R58.2 R60.2 R61.2 R89.2 R92.2 R93.2 R100.1 R105.1 R110.1 RCL1.1 RCL2.1 RCL3.1 RCL4.1 RCL5.1 RCL6.1 ZD4.2 ZD8.2 ZD12.2 | length 251.2
  TOP w0.6: BC23.1@5.63,44.1 v1(5.63,45.1) ; PC24.4@6.77,41.37 v1(6.77,43) ; BC26.1@11.63,44.1 v1(11.63,45.1) ; PC22.4@12.77,41.37 v1(12.77,43) ; BC22.1@17.63,44.1 v1(17.63,45.1) ; PC19.4@18.77,41.37 v1(18.77,43) ; DCDC6.7@21.53,24.1 24.307,21.323 C29.2@25.3,21.323 ; BC20.1@23.63,44.1 v1(23.63,45.1) ; PC25.4@24.77,41.37 v1(24.77,43) ; v1(28.25,22.323) 28.8,21.773 C39.2@28.8,21.323 ; BC25.1@29.63,44.1 v1(29.63,45.1) ; PC23.4@30.77,41.37 v1(30.77,43) ; PC30.2@31.03,19.3 31.03,19.903 31.65,20.523 R110.1@31.65,21.323 v1(31.65,22.273) ; C32.2@31.6,46.35 v1(32.95,46.35) ; v1(33,53.6) C34.2@34.1,53.6 ; BC24.1@35.63,44.1 v1(35.63,45.1) ; PC20.4@36.77,41.37 v1(36.77,43) ; v1(40.5,30) R92.2@40.5,31.15 R93.2@41.9,31.15 ; BC21.1@41.215,45.915 v1(41.215,46.934) ; v1(42.385,41.566) OP3.6@42.385,43.2 ; OP3.4@43.655,37 43.655,36.245 v1(44.2,35.7) ; OP3.5@43.655,43.2 v1(43.655,44.834) ; v1(45.2,31.4) R89.2@45.2,32.25 ; BC13.1@52.03,44.109 v1(52.03,45.109) ; PC15.4@53.17,41.379 v1(53.17,43.009) ; BC18.1@58.03,44.109 v1(58.03,45.109) ; PC13.4@59.17,41.379 v1(59.17,43.009) ; BC16.1@64.03,44.109 v1(64.03,45.109) ; PC10.4@65.17,41.379 v1(65.17,43.009) ; DCDC5.7@67.93,24.114 70.707,21.336 C18.2@71.7,21.336 ; BC14.1@70.03,44.109 v1(70.03,45.109) ; PC16.4@71.17,41.379 v1(71.17,43.009) ; v1(74.65,22.336) 75.2,21.786 C38.2@75.2,21.336 ; BC17.1@76.03,44.109 v1(76.03,45.109) ; PC14.4@77.17,41.379 v1(77.17,43.009) ; PC29.2@77.43,19.314 77.43,19.916 78.05,20.536 R105.1@78.05,21.336 v1(78.05,22.286) ; C19.2@79.5,46.35 v1(80.85,46.35) ; v1(80.9,53.6) C22.2@82,53.6 ; BC15.1@82.03,44.109 v1(82.03,45.109) ; PC11.4@83.17,41.379 v1(83.17,43.009) ; v1(86.9,30.014) R61.2@86.9,31.164 R60.2@88.3,31.164 ; BC12.1@87.615,45.929 v1(87.615,46.948) ; v1(88.785,41.58) OP2.6@88.785,43.214 ; OP2.4@90.055,37.014 90.055,36.258 v1(90.6,35.714) ; OP2.5@90.055,43.214 v1(90.055,44.848) ; v1(91.6,31.414) R58.2@91.6,32.264 ; BC3.1@97.93,44.123 v1(97.93,45.123) ; PC6.4@99.07,41.393 v1(99.07,43.023) ; BC6.1@103.93,44.123 v1(103.93,45.123) ; PC4.4@105.07,41.393 v1(105.07,43.023) ; BC5.1@109.93,44.123 v1(109.93,45.123) ; PC1.4@111.07,41.393 v1(111.07,43.023) ; DCDC4.7@113.83,24.127 115.073,24.127 C5.2@117.6,21.6 ; BC8.1@115.93,44.123 v1(115.93,45.123) ; PC7.4@117.07,41.393 v1(117.07,43.023) ; v1(120.55,22.6) 121.1,22.05 C37.2@121.1,21.6 ; BC7.1@121.93,44.123 v1(121.93,45.123) ; PC5.4@123.07,41.393 v1(123.07,43.023) ; PC28.2@123.33,19.577 123.33,20.18 123.95,20.8 R100.1@123.95,21.6 v1(123.95,22.55) ; C7.2@127.68,46.35 v1(129.03,46.35) ; BC10.1@127.93,44.123 v1(127.93,45.123) ; v1(128.8,53.6) C10.2@129.9,53.6 ; PC2.4@129.07,41.393 v1(129.07,43.023) ; v1(132.8,30.027) R30.2@132.8,31.177 R32.2@134.2,31.177 ; BC9.1@133.515,45.942 v1(133.515,46.962) ; OP1.6@134.685,43.227 134.685,42.215 135.1,41.8 v1(136,41.8) ; OP1.4@135.955,37.027 v1(135.955,40.2) ; OP1.5@135.955,43.227 v1(135.955,44.861) ; v1(137.5,31.127) R27.2@137.5,31.977
  TOP w1: CS6.2@25.4,74.55 28.1,77.25 CST6.2@31.1,77.25 33.15,77.25 35.35,75.05 ; C28.2@27.75,16.923 C28.2@27.75,17.529 ; C31.2@30.3,53.3 v1(31.3,53.3) ; C33.2@30.3,55.7 v1(31.3,55.7) ; v1(37.9,73.6) 37.9,72.1 ZD12.2@34.1,68.3 34.1,66 v1(33.6,65.5) ; CS5.2@73.3,74.55 76,77.25 CST5.2@79,77.25 81.05,77.25 83.4,74.9 83.2,74.7 ; C17.2@74.15,16.936 C17.2@74.15,17.542 ; C21.2@78.2,53.3 v1(79.2,53.3) ; C20.2@78.2,55.7 v1(79.2,55.7) ; v1(85.8,73.6) 85.8,72.1 ZD8.2@82,68.3 82,66 v1(81.5,65.5) ; C6.2@118.4,17.4 120.2,17.4 122.377,19.577 PC28.2@123.33,19.577 ; CS4.2@121.2,74.55 123.9,77.25 CST4.2@127.18,77.25 128.95,77.25 131.35,74.85 ; C8.2@126.1,53.3 v1(127.1,53.3) ; C9.2@126.1,55.7 v1(127.1,55.7) ; v1(133.5,73.6) 133.5,71.9 ZD4.2@129.9,68.3 129.9,66 v1(129.4,65.5) ; C28.2@27.75,17.529 v1(27.75,18.379) v1(28.6,18.379) C28.2@27.75,17.529 ; EC14.2@31.4,64.55 32.15,64.55 32.3,64.7 ; EC14.2@31.4,64.55 31.4,64.75 32.15,65.5 v1(32.8,65.5) ; EC14.2@31.4,64.55 31.4,64.35 31.85,63.9 v1(32.8,63.9) ; 32.3,64.7 v1(32.8,64.7) v1(33.6,64.7) ; 32.3,64.7 32.3,65 v1(32.8,65.5) ; 32.3,64.7 32.3,64.4 v1(32.8,63.9) ; v1(32.8,63.9) v1(33.6,63.9) v1(33.6,64.7) ; v1(32.8,65.5) v1(33.6,65.5) ; v1(33.6,64.7) v1(33.6,65.5) ; C17.2@74.15,17.542 v1(74.15,18.392) v1(75,18.392) C17.2@74.15,17.542 ; EC10.2@79.3,64.55 79.3,64.75 80.05,65.5 v1(80.7,65.5) ; EC10.2@79.3,64.55 80.05,64.55 80.2,64.7 ; EC10.2@79.3,64.55 79.3,64.35 79.75,63.9 v1(80.7,63.9) ; 80.2,64.7 80.2,65 v1(80.7,65.5) ; 80.2,64.7 80.2,64.4 v1(80.7,63.9) ; 80.2,64.7 v1(80.7,64.7) v1(81.5,64.7) ; v1(80.7,63.9) v1(81.5,63.9) v1(81.5,64.7) ; v1(80.7,65.5) v1(81.5,65.5) ; v1(81.5,64.7) v1(81.5,65.5) ; EC6.2@127.2,64.55 127.2,64.35 127.65,63.9 v1(128.6,63.9) ; EC6.2@127.2,64.55 127.2,64.75 127.95,65.5 v1(128.6,65.5) ; EC6.2@127.2,64.55 127.95,64.55 128.1,64.7 ; 128.1,64.7 v1(128.6,64.7) v1(129.4,64.7) ; 128.1,64.7 128.1,64.4 v1(128.6,63.9) ; 128.1,64.7 128.1,65 v1(128.6,65.5) ; v1(128.6,63.9) v1(129.4,63.9) v1(129.4,64.7) ; v1(128.6,65.5) v1(129.4,65.5) ; v1(129.4,64.7) v1(129.4,65.5)
  LAYER2 w0.5: 61.749,24.114 DCDC5.5@62.85,24.114 ; 62.85,23.013 DCDC5.5@62.85,24.114 ; 63.951,24.114 DCDC5.5@62.85,24.114 ; 66.829,24.114 DCDC5.7@67.93,24.114 ; 67.93,23.013 DCDC5.7@67.93,24.114 ; 69.031,24.114 DCDC5.7@67.93,24.114 ; 107.649,24.127 DCDC4.5@108.75,24.127 ; 108.75,23.026 DCDC4.5@108.75,24.127 ; 109.851,24.127 DCDC4.5@108.75,24.127 ; 112.729,24.127 DCDC4.7@113.83,24.127 ; 113.83,23.026 DCDC4.7@113.83,24.127 ; 114.931,24.127 DCDC4.7@113.83,24.127
  LAYER2 w1: 36.702,49.414 IPM6.16@36.702,50.5 36.702,51.586 ; 84.602,49.414 IPM5.16@84.602,50.5 84.602,51.586 ; 132.502,49.414 IPM4.16@132.502,50.5 132.502,51.586
  other v1: 108.998,9.3 109.798,9.3 110.598,9.3 111.398,9.3 108.998,10.1 109.798,10.1 110.598,10.1 111.398,10.1 38.7,73.6 39.5,73.6 40.3,73.6 41.1,73.6 86.6,73.6 87.4,73.6 88.2,73.6 89,73.6 134.3,73.6 135.1,73.6 135.9,73.6 136.7,73.6 137.43,73.6 37.9,74.4 38.7,74.4 39.5,74.4 40.3,74.4 41.1,74.4 85.8,74.4 86.6,74.4 87.4,74.4 88.2,74.4 89,74.4 133.5,74.4 134.3,74.4 135.1,74.4 135.9,74.4 136.7,74.4 137.43,74.4 41.3,101.2 42.1,101.2 42.9,101.2 43.7,101.2 44.5,101.2 89.2,101.2 90,101.2 90.8,101.2 91.6,101.2 92.4,101.2 137.38,101.2 138.18,101.2 138.98,101.2 139.78,101.2 140.58,101.2 41.3,102 42.1,102 42.9,102 43.7,102 44.5,102 89.2,102 90,102 90.8,102 91.6,102 92.4,102 137.38,102 138.18,102 138.98,102 139.78,102 140.58,102
CVTP5_4: C5.1 QN4.2 R8.1 R96.1 R98.1 | length 7.7
  TOP w0.6: R8.1@120.75,19.8 120.75,20.25 C5.1@119.4,21.6 119.4,22.15 118.75,22.8 R96.1@118.75,23.4 118.85,23.5 R98.1@120.25,23.5 120.9,23.5 121.15,23.25 QN4.2@121.9,23.25
CVTP5_4_PRE: DCDC4.4 F5V_4.1 | length 12.9
  TOP w0.6: v1(112.85,22.4) 114.7,22.4 F5V_4.1@117.3,19.8
  BOTTOM w0.6: DCDC4.4@106.21,24.127 107.937,22.4 v1(112.85,22.4)
CVTP5_5: C18.1 QN5.2 R39.1 R101.1 R102.1 | length 7.7
  TOP w0.6: R39.1@74.85,19.536 74.85,19.986 C18.1@73.5,21.336 73.5,21.886 72.85,22.536 R102.1@72.85,23.136 72.95,23.236 R101.1@74.35,23.236 75,23.236 75.25,22.986 QN5.2@76,22.986
CVTP5_5_PRE: DCDC5.4 F5V_5.1 | length 13
  TOP w0.6: DCDC5.4@60.31,24.114 62.024,22.4 67.5,22.4 70.363,19.536 F5V_5.1@71.4,19.536
CVTP5_6: C29.1 QN6.2 R70.1 R106.1 R107.1 | length 7.7
  TOP w0.6: R70.1@28.45,19.523 28.45,19.973 C29.1@27.1,21.323 27.1,21.873 26.45,22.523 R107.1@26.45,23.123 26.55,23.223 R106.1@27.95,23.223 28.6,23.223 28.85,22.973 QN6.2@29.6,22.973
CVTP5_6_PRE: DCDC6.4 F5V_6.1 | length 13
  TOP w0.6: DCDC6.4@13.91,24.1 15.624,22.386 21.1,22.386 23.964,19.523 F5V_6.1@25,19.523
CVTP15_4: BC3.2 BC5.2 BC6.2 BC7.2 BC8.2 BC9.2 BC10.2 C6.1 C7.1 C8.1 C9.1 EC6.1 IPM4.8 IPM4.13 OP1.8 PC1.6 PC2.6 PC4.6 PC5.6 PC6.6 PC7.6 R7.1 R20.1 R21.1 ZD4.1 | length 126.6
  TOP w0.6: PC6.6@96.53,41.393 BC3.2@96.53,44.123 96.53,45.53 97.15,46.15 v1(97.95,46.15) ; PC4.6@102.53,41.393 BC6.2@102.53,44.123 v1(102.53,45.123) ; PC1.6@108.53,41.393 BC5.2@108.53,44.123 v1(108.53,45.123) ; PC7.6@114.53,41.393 BC8.2@114.53,44.123 v1(114.53,45.123) ; PC5.6@120.53,41.393 BC7.2@120.53,44.123 v1(120.53,45.123) ; PC2.6@126.53,41.393 BC10.2@126.53,44.123 v1(126.53,45.123) ; IPM4.13@127.168,50.5 127.168,48.662 C7.1@127.68,48.15 v1(129.03,48.15) ; v1(128,22.45) 128,23.227 R20.1@128.55,23.777 ; v1(132.115,46.962) BC9.2@132.115,45.942 132.145,45.912 OP1.8@132.145,43.227 ; R21.1@136.9,27.527 138.027,27.527 v1(138.2,27.7)
  TOP w0.8: R7.1@115,17.4 C6.1@116.6,17.4
  TOP w1: v1(113.275,20.2) v1(114.15,20.2) 114.9,20.2 116.6,18.5 C6.1@116.6,17.4 ; IPM4.8@118.278,50.5 118.278,52.178 119.4,53.3 C8.1@124.3,53.3 C9.1@124.3,55.7 124.3,57.7 v1(125.1,58.5) ; ZD4.1@125.5,68.3 125.5,60.5 ; v1(125.1,58.5) v1(125.9,58.5) ; v1(125.1,58.5) v1(125.1,59.3) ; v1(125.1,59.3) v1(125.9,59.3) ; v1(125.1,59.3) v1(125.1,60.1) ; v1(125.1,60.1) v1(125.9,60.1) ; v1(125.1,60.1) 125.5,60.5 ; 125.5,60.5 v1(125.9,60.1) ; v1(125.9,58.5) v1(125.9,59.3) ; v1(125.9,58.5) 126.55,58.5 EC6.1@127.2,59.15 ; v1(125.9,59.3) v1(125.9,60.1) ; v1(125.9,59.3) 127.05,59.3 EC6.1@127.2,59.15 ; v1(125.9,60.1) 126.8,60.1 127.2,59.7 EC6.1@127.2,59.15
  LAYER3 w1: v1(113.275,20.2) v1(114.15,20.2) 115.65,18.7 134.6,18.7 138.7,22.8 138.7,26.9 ; 118.278,49.414 IPM4.8@118.278,50.5 118.278,51.586 ; 127.168,49.414 IPM4.13@127.168,50.5 127.168,51.586 ; 137.8,27.8 138.7,26.9 ; 138.7,28.7 138.7,26.9
  BOTTOM w0.6: v1(128,22.45) 128.65,23.1 132.5,23.1 137.1,27.7 v1(138.2,27.7)
CVTP15_4_PRE: DCDC4.6 F15V_4.1 | length 6.8
  TOP w0.6: DCDC4.6@111.29,24.127 111.29,19.36 111.55,19.1 F15V_4.1@111.55,17.4
CVTP15_5: BC12.2 BC13.2 BC14.2 BC15.2 BC16.2 BC17.2 BC18.2 C17.1 C19.1 C20.1 C21.1 EC10.1 IPM5.8 IPM5.13 OP2.8 PC10.6 PC11.6 PC13.6 PC14.6 PC15.6 PC16.6 R38.1 R51.1 R52.1 ZD8.1 | length 74.9
  TOP w0.6: PC15.6@50.63,41.379 BC13.2@50.63,44.109 v1(50.63,45.109) ; PC13.6@56.63,41.379 BC18.2@56.63,44.109 v1(56.63,45.109) ; PC10.6@62.63,41.379 BC16.2@62.63,44.109 v1(62.63,45.109) ; PC16.6@68.63,41.379 BC14.2@68.63,44.109 v1(68.63,45.109) ; PC14.6@74.63,41.379 BC17.2@74.63,44.109 v1(74.63,45.109) ; IPM5.13@79.268,50.5 79.268,48.382 C19.1@79.5,48.15 v1(80.85,48.15) ; PC11.6@80.63,41.379 BC15.2@80.63,44.109 v1(80.63,45.109) ; v1(81.85,22.25) 82.15,22.55 R51.1@82.15,23.514 ; v1(86.215,46.948) BC12.2@86.215,45.929 86.245,45.899 OP2.8@86.245,43.214 ; v1(91,26.714) R52.1@91,27.814
  TOP w0.8: R38.1@70.75,16.936 C17.1@72.35,16.936
  TOP w1: IPM5.8@70.378,50.5 70.378,52.178 71.5,53.3 C21.1@76.4,53.3 C20.1@76.4,55.7 76.4,57.7 v1(77.2,58.5) ; C17.1@72.35,16.936 C17.1@72.35,17.592 ; ZD8.1@77.6,68.3 77.6,60.5 ; C17.1@72.35,17.592 v1(72.35,18.392) v1(71.55,18.392) C17.1@72.35,17.592 ; v1(77.2,58.5) v1(77.2,59.3) ; v1(77.2,58.5) v1(78,58.5) ; v1(77.2,59.3) v1(77.2,60.1) ; v1(77.2,59.3) v1(78,59.3) ; v1(77.2,60.1) 77.6,60.5 ; v1(77.2,60.1) v1(78,60.1) ; 77.6,60.5 v1(78,60.1) ; v1(78,58.5) 78.65,58.5 EC10.1@79.3,59.15 ; v1(78,58.5) v1(78,59.3) ; v1(78,59.3) v1(78,60.1) ; v1(78,59.3) 79.15,59.3 EC10.1@79.3,59.15 ; v1(78,60.1) 78.9,60.1 79.3,59.7 EC10.1@79.3,59.15
  LAYER3 w1: 70.378,49.414 IPM5.8@70.378,50.5 70.378,51.586 ; 79.268,49.414 IPM5.13@79.268,50.5 79.268,51.586
CVTP15_5_PRE: DCDC5.6 F15V_5.1 | length 7.4
  TOP w0.6: F15V_5.1@68.2,17.85 v1(68.2,18.65)
  BOTTOM w0.6: DCDC5.6@65.39,24.114 65.39,21.46 v1(68.2,18.65)
CVTP15_6: BC20.2 BC21.2 BC22.2 BC23.2 BC24.2 BC25.2 BC26.2 C28.1 C31.1 C32.1 C33.1 EC14.1 IPM6.8 IPM6.13 OP3.8 PC19.6 PC20.6 PC22.6 PC23.6 PC24.6 PC25.6 R69.1 R82.1 R83.1 ZD12.1 | length 74.9
  TOP w0.6: PC24.6@4.23,41.37 BC23.2@4.23,44.1 v1(4.23,45.1) ; PC22.6@10.23,41.37 BC26.2@10.23,44.1 v1(10.23,45.1) ; PC19.6@16.23,41.37 BC22.2@16.23,44.1 v1(16.23,45.1) ; PC25.6@22.23,41.37 BC20.2@22.23,44.1 v1(22.23,45.1) ; PC23.6@28.23,41.37 BC25.2@28.23,44.1 v1(28.23,45.1) ; IPM6.13@31.368,50.5 31.368,48.382 C32.1@31.6,48.15 v1(32.95,48.15) ; PC20.6@34.23,41.37 BC24.2@34.23,44.1 v1(34.23,45.1) ; v1(35.45,22.236) 35.75,22.536 R82.1@35.75,23.5 ; v1(39.815,46.934) BC21.2@39.815,45.915 39.845,45.885 OP3.8@39.845,43.2 ; v1(44.6,26.7) R83.1@44.6,27.8
  TOP w0.8: R69.1@24.35,16.923 C28.1@25.95,16.923
  TOP w1: IPM6.8@22.478,50.5 22.478,52.178 23.6,53.3 C31.1@28.5,53.3 C33.1@28.5,55.7 28.5,57.7 v1(29.3,58.5) ; C28.1@25.95,16.923 C28.1@25.95,17.579 ; ZD12.1@29.7,68.3 29.7,60.5 ; C28.1@25.95,17.579 v1(25.15,18.379) v1(25.95,18.379) C28.1@25.95,17.579 ; v1(29.3,58.5) v1(29.3,59.3) ; v1(29.3,58.5) v1(30.1,58.5) ; v1(29.3,59.3) v1(30.1,59.3) ; v1(29.3,59.3) v1(29.3,60.1) ; v1(29.3,60.1) v1(30.1,60.1) ; v1(29.3,60.1) 29.7,60.5 ; 29.7,60.5 v1(30.1,60.1) ; v1(30.1,58.5) v1(30.1,59.3) ; v1(30.1,58.5) 30.75,58.5 EC14.1@31.4,59.15 ; v1(30.1,59.3) v1(30.1,60.1) ; v1(30.1,59.3) 31.25,59.3 EC14.1@31.4,59.15 ; v1(30.1,60.1) 31,60.1 31.4,59.7 EC14.1@31.4,59.15
  LAYER3 w1: 22.478,49.414 IPM6.8@22.478,50.5 22.478,51.586 ; 31.368,49.414 IPM6.13@31.368,50.5 31.368,51.586
CVTP15_6_PRE: DCDC6.6 F15V_6.1 | length 8
  TOP w0.6: F15V_6.1@20.9,16.923 v1(20.9,17.85)
  BOTTOM w0.6: DCDC6.6@18.99,24.1 18.99,19.76 v1(20.9,17.85)
D0: CNPWM4.39 R111.1 R112.2 | length 21.5
  TOP w0.3: v1(62.85,10.3) 65.9,10.3 66.55,10.95 66.55,12.75 66.25,13.05 R111.1@65.5,13.05 R112.2@65.5,14.35
  BOTTOM w0.3: CNPWM4.39@57.946,2.775 57.946,7.754 57.15,8.55 57.15,9.8 57.65,10.3 v1(62.85,10.3)
DC_P3: CNPN3.01 CNPN3.02 CNPN3.03 CNPN3.04 CNPN3.07 CNPN3.08 F2.2 | length 38.5
  TOP w1: CNPN3.08@114.798,2.775 v1@114.798,9.3 ; CNPN3.04@118.798,2.775 v1@118.798,9.3 ; CNPN3.02@120.798,2.772 120.798,8.6
  BOTTOM w1: CNPN3.07@114.798,2.775 v1@114.798,9.3 ; CNPN3.03@118.798,2.775 v1@118.798,9.3 ; CNPN3.01@120.798,2.772 120.798,9.3
  other v1: 114.598,9.3 115.398,9.3 116.198,9.3 116.998,9.3 117.798,9.3 118.598,9.3 114.598,10.1 115.398,10.1 116.198,10.1 116.998,10.1 117.798,10.1 118.598,10.1 144.898,28 145.698,28 144.898,28.75 145.698,28.75 144.898,29.55 145.698,29.55 144.898,30.25 145.698,30.25 144.898,31 145.698,31 144.898,31.8 145.698,31.8